# Altium PCB VE_Test_MEA_Solid_4mmpitch.PcbDoc
Units mm, origin at the board's own origin, x right, y up, seen from the top; angles counter-clockwise.
Board outline 49 x 49 mm, 4 copper layers (Top Copper Layer, Internal Copper Layer 1, Internal Copper Layer 2, Bottom Copper Layer), stack 1.58 mm thick; 1 components, 1 nets, 120 pads, 0 vias.
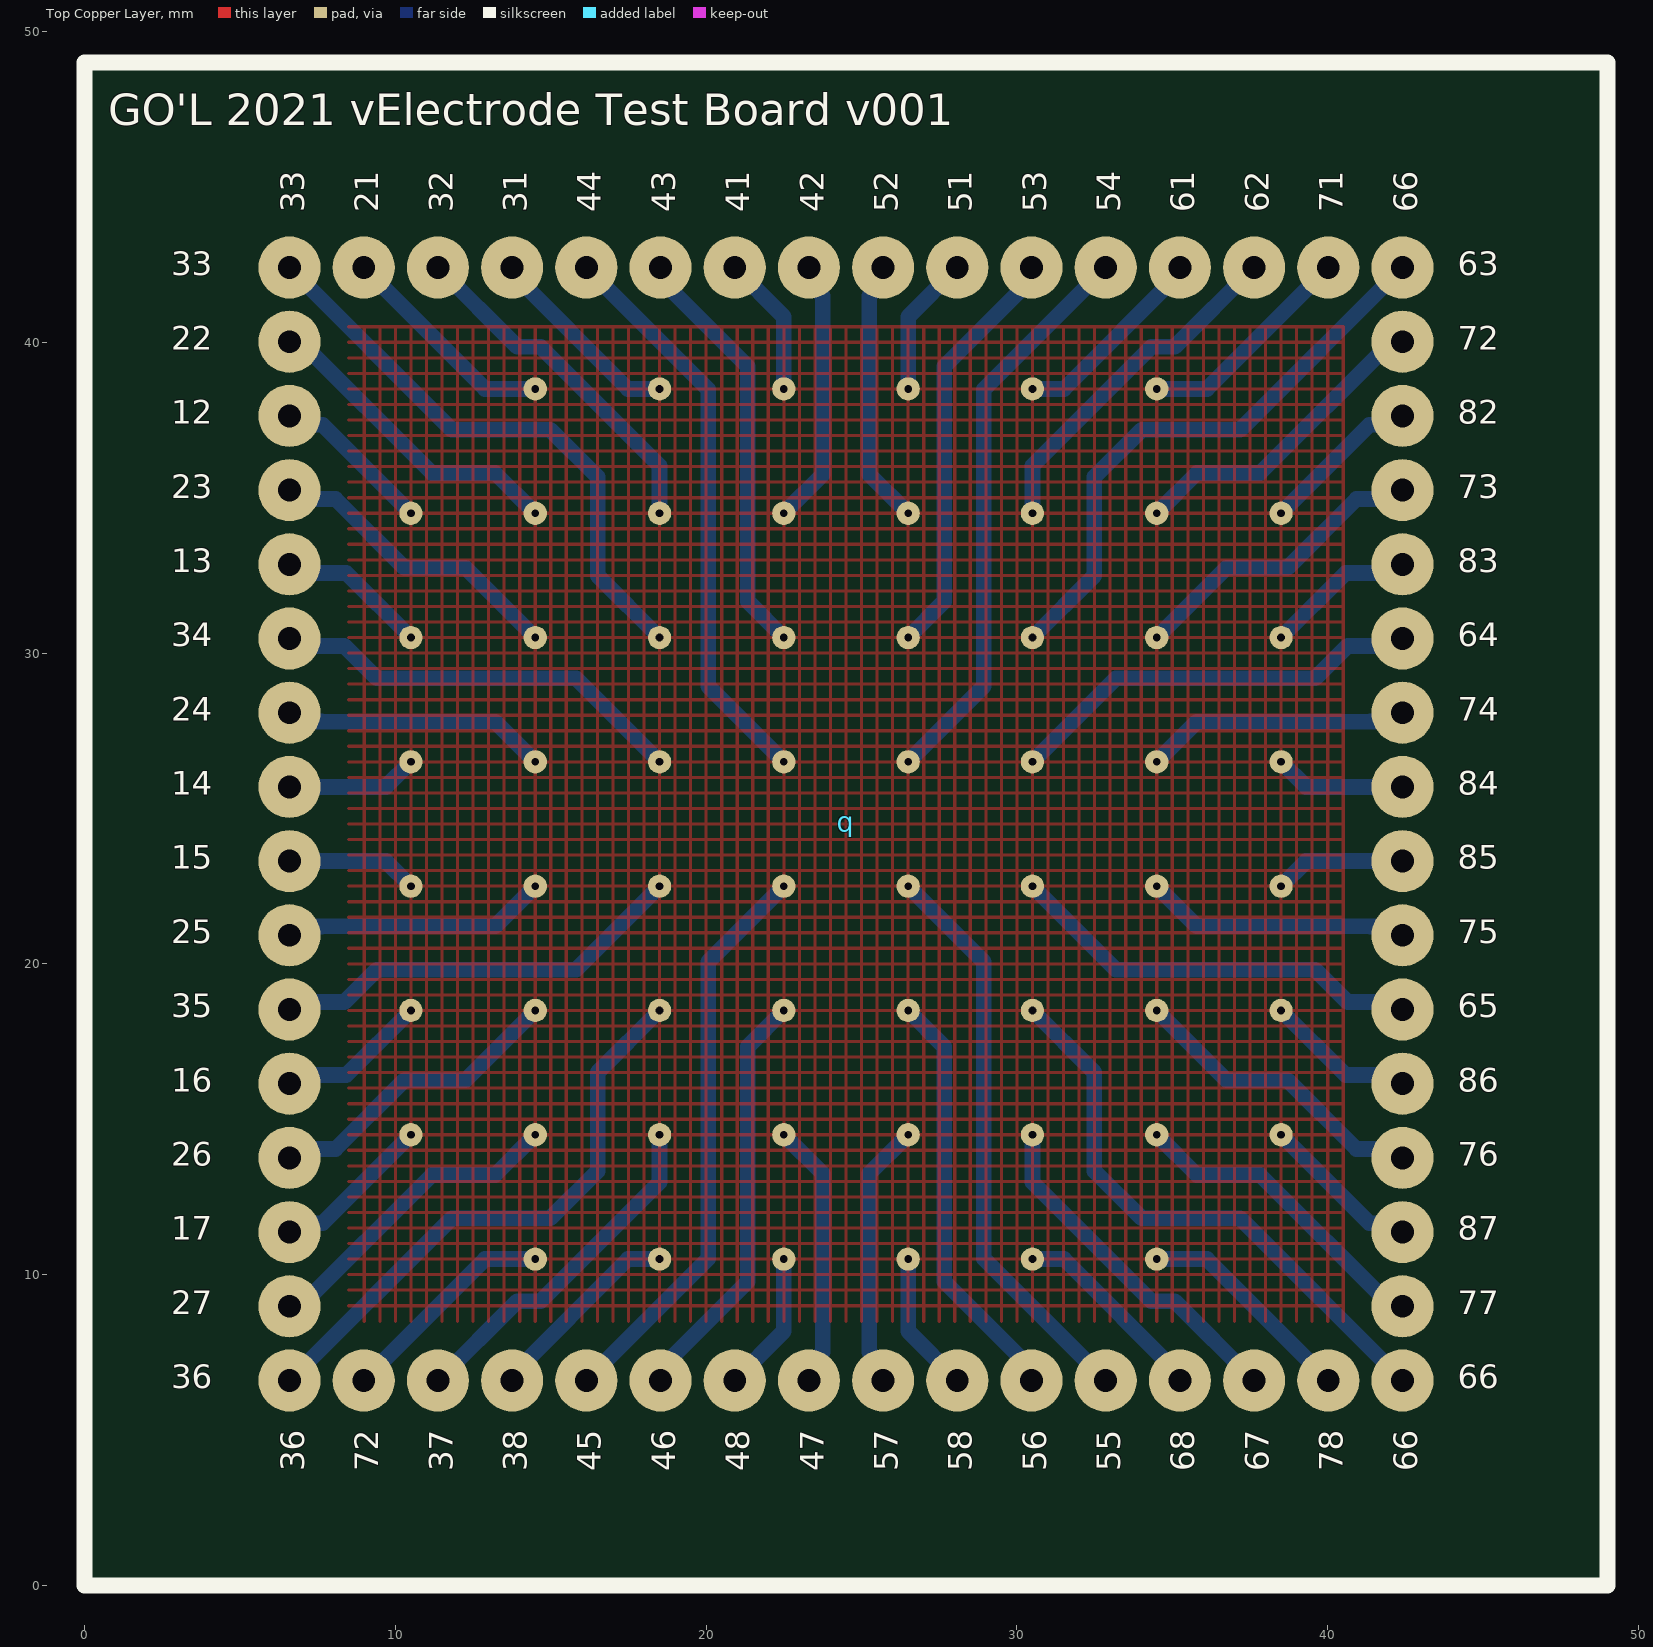
[diagram p0: Top Copper Layer view]
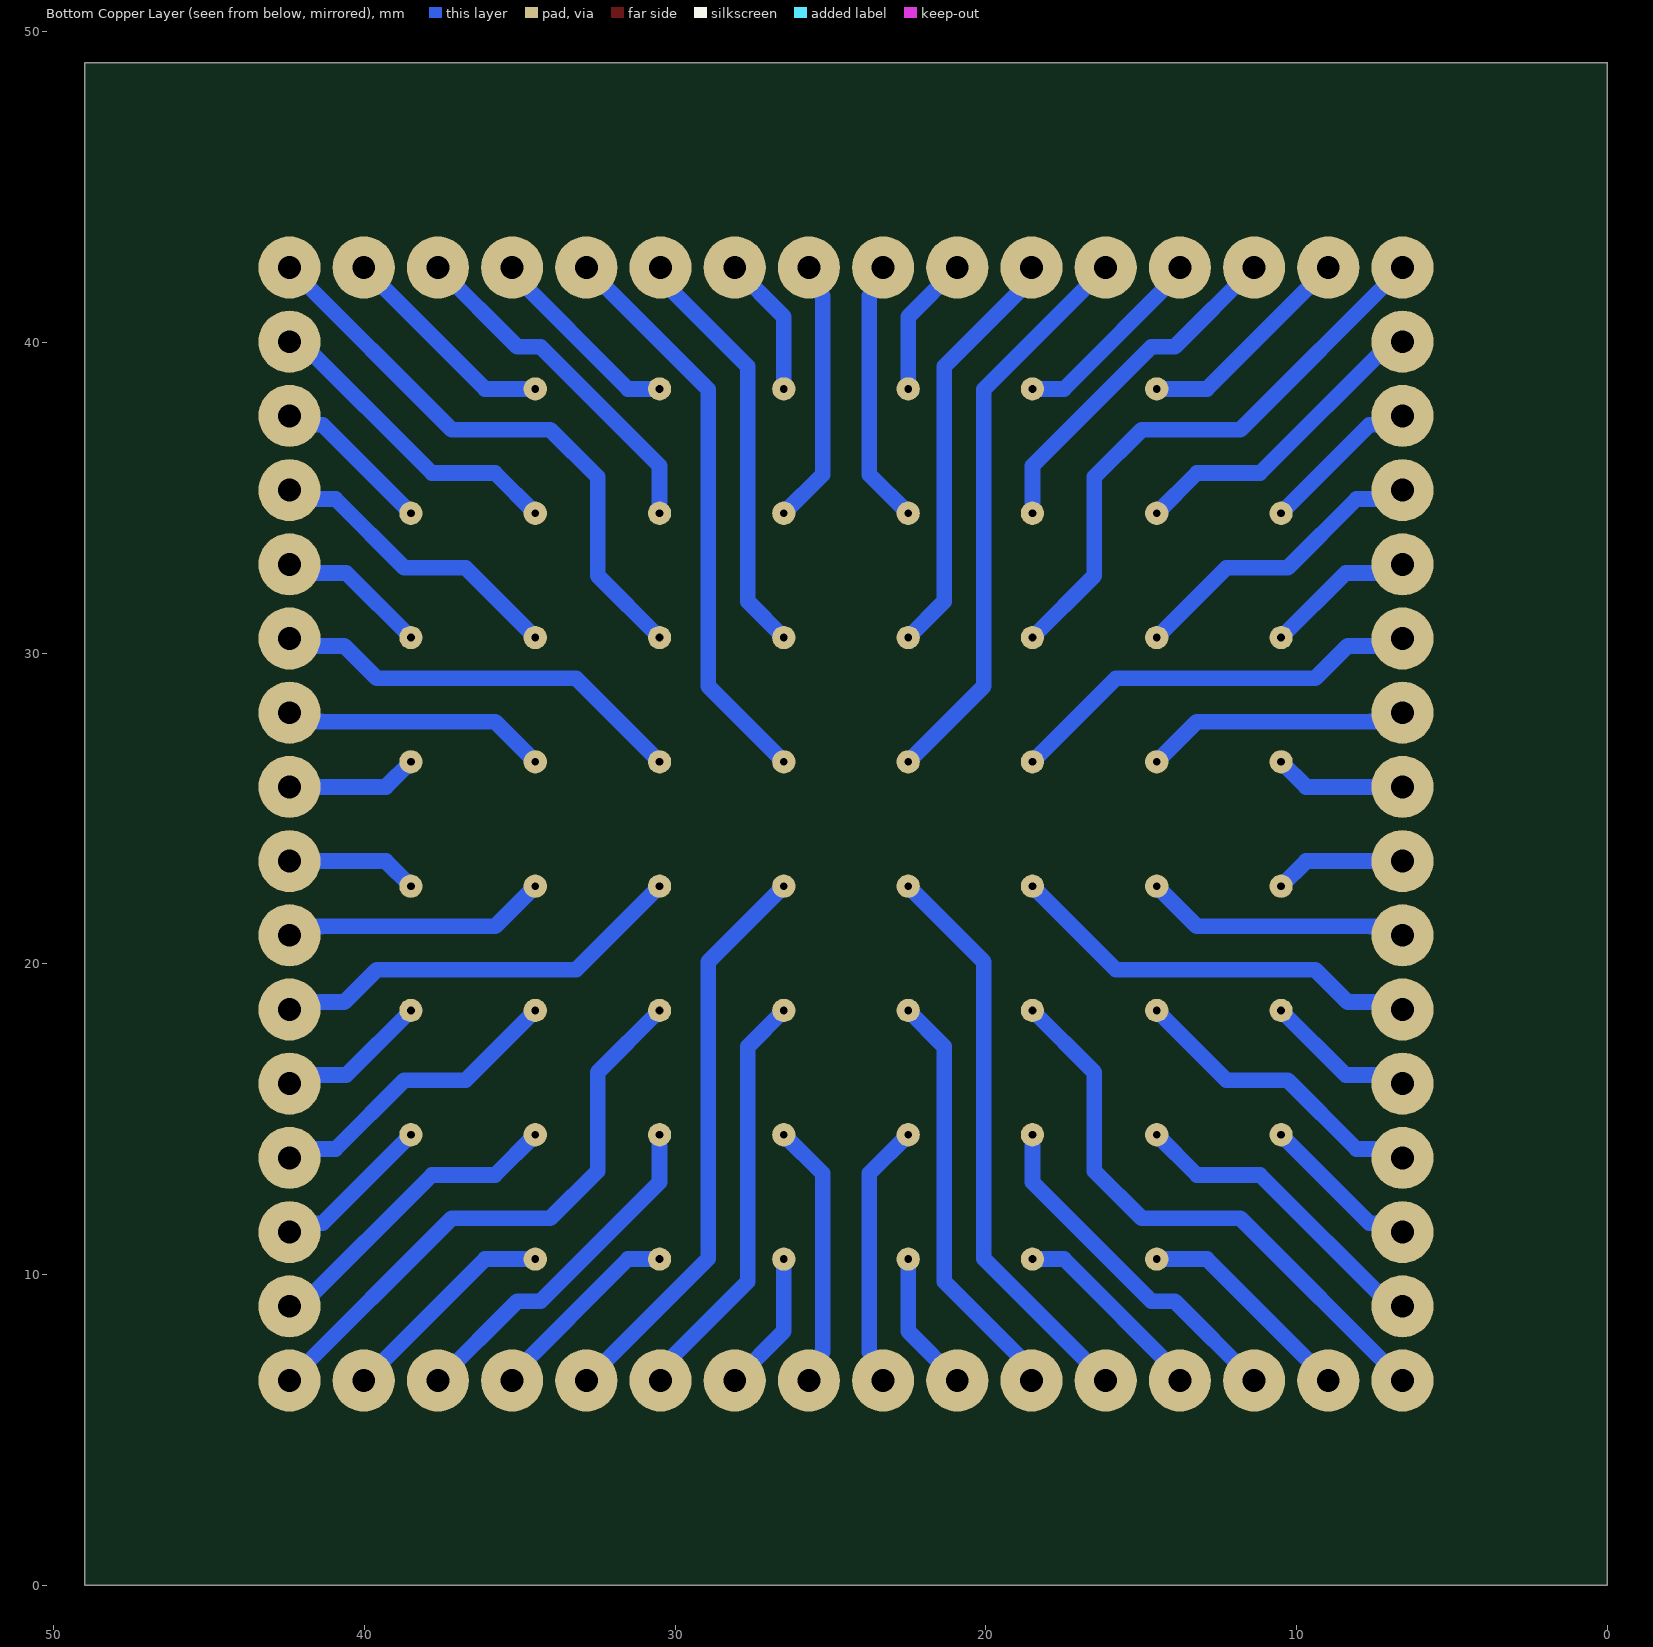
[diagram p1: Bottom Copper Layer view, seen from below]

## Layer stack, top to bottom
Top Solder: solder mask 0.01, Solder Resist, Dk 3.5
Top Copper Layer: signal copper 0.035
Dielectric 1: prepreg 0.22, FR-4, Dk 4.2
Internal Copper Layer 1: signal copper 0.035
Dielectric 2: core 1, FR-4, Dk 4.2
Internal Copper Layer 2: signal copper 0.035
Dielectric 3: prepreg 0.22, FR-4, Dk 4.2
Bottom Copper Layer: signal copper 0.035
Bottom Solder: solder mask 0.01, Solder Resist, Dk 3.5

## Board outline
0,0 49,0 49,49 0,49

## Design rules (kind name [scope] priority, off if disabled: settings)
BoardOutlineClearance [All] p1: gap=0.4 ignorepadtopadclearanceinfootprint=FALSE
Clearance [All] p1: gap=0.102 ignorepadtopadclearanceinfootprint=TRUE
ComponentClearance [All] p1: gap=0.15 collisioncheckmode=3 verticalgap=0.15 showdistances=FALSE
HoleSize [All] p1: absolutevalues=TRUE maxlimit=0.4 minlimit=0.25 maxpercent=80.000 minpercent=20.000
HoleToHoleClearance [All] p1: gap=0.45 allowstackedmicrovias=TRUE
MinimumAnnularRing [All] p1: minimumring=0.15
MinimumSolderMaskSliver [All] p1: minsoldermaskwidth=0.15
PlaneClearance [All] p1: clearance=0.15
PlaneConnect [All] p1: planeconnectstyle=Relief reliefexpansion=0.25 reliefentries=4 reliefconductorwidth=0.15 reliefairgap=0.15
PolygonConnect [All] p1: connectstyle=Direct reliefconductorwidth=0.15 reliefentries=4 polygonreliefangle="90 Angle" airgapwidth=0.15
RoomDefinition VE_Test_MEA_Solid [InComponentClass('VE_Test_MEA_Solid')] p1 off: confinementstyle=ConfineIn formatcopy=TRUE lockcomponents=FALSE outline 0,0 50.8,0 50.8,25.4 0,25.4
RoutingVias [All] p1: holewidth=0.25 width=0.55 viastyle="Through Hole" minholewidth=0.25 minwidth=0.55 maxholewidth=0.4 maxwidth=0.8
SilkToSilkClearance [All] p1: silktosilkclearance=0.2
SilkToSolderMaskClearance [IsPad] p1: minsilkscreentomaskgap=0.2 clearancetoexposedcopper=TRUE
SolderMaskExpansion [All] p1: expansion=0.15 istentingtop=FALSE
Width [All] p1: maxlimit=50 minlimit=0.15 preferedwidth=0.203
22 further rules are at their usual default settings.

## Components (designator, comment, footprint, x,y, rotation, side; value= is the part's Value field where it differs from the comment)
q "POGO_PINS" MCS_MEA_VE_TEST 24.5,24.5 r0 top locked (schematic designator *?)

## Footprints (in the part's own frame and the unit in brackets; to place one, negate y for a bottom-side part, rotate by r counter-clockwise, add the part's x,y. Pads: shape width x height; smd on the part's side, far side on the other; paste and mask are expansions set on the pad)
MCS_MEA_VE_TEST [mm]
  round 2 hole 0.737 mask+0.15: 12(-17.907,13.132) 13(-17.907,8.357) 14(-17.907,1.194) 15(-17.907,-1.194) 16(-17.907,-8.357) 17(-17.907,-13.132) 21(-15.519,17.907) 22(-17.907,15.519) 23(-17.907,10.744) 24(-17.907,3.581) 25(-17.907,-3.581) 26(-17.907,-10.744) 27(-17.907,-15.519) 28(-15.519,-17.907) 31(-10.744,17.907) 32(-13.132,17.907) 33(-17.907,17.907) 34(-17.907,5.969) 35(-17.907,-5.969) 36(-17.907,-17.907) 37(-13.132,-17.907) 38(-10.744,-17.907) 41(-3.581,17.907) 42(-1.194,17.907) 43(-5.969,17.907) 44(-8.357,17.907) 45(-8.357,-17.907) 46(-5.969,-17.907) 47(-1.194,-17.907) 48(-3.581,-17.907) 51(3.581,17.907) 52(1.194,17.907) 53(5.969,17.907) 54(8.357,17.907) 55(8.357,-17.907) 56(5.969,-17.907) 57(1.194,-17.907) 58(3.581,-17.907) 61(10.744,17.907) 62(13.132,17.907) 63(17.907,17.907) 64(17.907,5.969) 65(17.907,-5.969) 66(17.907,-17.907) 67(13.132,-17.907) 68(10.744,-17.907) 71(15.519,17.907) 72(17.907,15.519) 73(17.907,10.744) 74(17.907,3.581) 75(17.907,-3.581) 76(17.907,-10.744) 77(17.907,-15.519) 78(15.519,-17.907) 82(17.907,13.132) 83(17.907,8.357) 84(17.907,1.194) 85(17.907,-1.194) 86(17.907,-8.357) 87(17.907,-13.132)
  round 0.75 hole 0.25 mask+0: 12(-14,10) 13(-14,6) 14(-14,2) 15(-14,-2) 16(-14,-6) 17(-14,-10) 21(-10,14) 22(-10,10) 23(-10,6) 24(-10,2) 25(-10,-2) 26(-10,-6) 27(-10,-10) 28(-10,-14) 31(-6,14) 32(-6,10) 33(-6,6) 34(-6,2) 35(-6,-2) 36(-6,-6) 37(-6,-10) 38(-6,-14) 41(-2,14) 42(-2,10) 43(-2,6) 44(-2,2) 45(-2,-2) 46(-2,-6) 47(-2,-10) 48(-2,-14) 51(2,14) 52(2,10) 53(2,6) 54(2,2) 55(2,-2) 56(2,-6) 57(2,-10) 58(2,-14) 61(6,14) 62(6,10) 63(6,6) 64(6,2) 65(6,-2) 66(6,-6) 67(6,-10) 68(6,-14) 71(10,14) 72(10,10) 73(10,6) 74(10,2) 75(10,-2) 76(10,-6) 77(10,-10) 78(10,-14) 82(14,10) 83(14,6) 84(14,2) 85(14,-2) 86(14,-6) 87(14,-10)
  silkscreen extent -24.5,-24.5 24.5,24.5

## Nets (pads, with @x,y where several pads share a name; then routed paths per layer and width w, separated by ;. In a path a pad name is that pad's centre, name@x,y a point inside that pad or via, vN(x,y) a via of type N, cw(c..) or ccw(c..) an arc to the next point about the centre after c; other vN are vias at no path point)
Net*?_12: q.12 q.13 q.14 q.15 q.16 q.17 q.21 q.22 q.23 q.24 q.25 q.26 q.27 q.28 q.31 q.32 q.33 q.34 q.35 q.36 q.37 q.38 q.41 q.42 q.43 q.44 q.45 q.46 q.47 q.48 q.51 q.52 q.53 q.54 q.55 q.56 q.57 q.58 q.61 q.62 q.63 q.64 q.65 q.66 q.67 q.68 q.71 q.72 q.73 q.74 q.75 q.76 q.77 q.78 q.82 q.83 q.84 q.85 q.86 q.87 | length 581.5
  Bottom Copper Layer w0.508: q.36@6.593,6.593 11.811,11.811 14.986,11.811 16.51,13.335 16.51,16.51 q.36@18.5,18.5 ; q.27@6.593,8.981 6.949,8.981 11.176,13.208 13.208,13.208 q.27@14.5,14.5 ; q.17@6.593,11.368 6.878,11.654 7.654,11.654 q.17@10.5,14.5 ; q.26@6.593,13.756 6.878,14.041 8.072,14.041 10.287,16.256 12.256,16.256 q.26@14.5,18.5 ; q.16@6.593,16.143 6.87,16.42 8.42,16.42 q.16@10.5,18.5 ; q.35@6.593,18.531 6.831,18.769 8.355,18.769 9.398,19.812 15.812,19.812 q.35@18.5,22.5 ; q.25@6.593,20.919 6.878,21.204 7.632,21.204 7.637,21.209 13.209,21.209 q.25@14.5,22.5 ; q.15@6.593,23.306 9.694,23.306 q.15@10.5,22.5 ; q.14@6.593,25.694 9.694,25.694 q.14@10.5,26.5 ; q.24@6.593,28.081 6.878,27.796 7.632,27.796 7.637,27.791 13.209,27.791 q.24@14.5,26.5 ; q.34@6.593,30.469 6.831,30.231 8.355,30.231 9.398,29.188 15.812,29.188 q.34@18.5,26.5 ; q.13@6.593,32.857 6.87,32.58 8.42,32.58 q.13@10.5,30.5 ; q.23@6.593,35.244 6.878,34.959 8.072,34.959 10.287,32.744 12.256,32.744 q.23@14.5,30.5 ; q.12@6.593,37.632 6.878,37.346 7.654,37.346 q.12@10.5,34.5 ; q.22@6.593,40.019 6.949,40.019 11.176,35.792 13.208,35.792 q.22@14.5,34.5 ; q.33@6.593,42.407 11.811,37.189 14.986,37.189 16.51,35.665 16.51,32.49 q.33@18.5,30.5 ; q.28@8.981,6.593 12.888,10.5 q.28@14.5,10.5 ; q.21@8.981,42.407 12.888,38.5 q.21@14.5,38.5 ; q.37@11.368,6.593 13.919,9.144 14.671,9.144 18.5,12.973 q.37@18.5,14.5 ; q.32@11.368,42.407 13.919,39.856 14.671,39.856 18.5,36.027 q.32@18.5,34.5 ; q.38@13.756,6.593 13.756,6.771 17.485,10.5 q.38@18.5,10.5 ; q.31@13.756,42.407 13.756,42.229 17.485,38.5 q.31@18.5,38.5 ; q.45@16.143,6.593 20.066,10.516 20.066,20.066 q.45@22.5,22.5 ; q.44@16.143,42.407 20.066,38.484 20.066,28.934 q.44@22.5,26.5 ; q.46@18.531,6.593 18.531,6.974 21.336,9.779 21.336,17.336 q.46@22.5,18.5 ; q.43@18.531,42.407 18.531,42.026 21.336,39.221 21.336,31.664 q.43@22.5,30.5 ; q.48@20.919,6.593 22.5,8.174 q.48@22.5,10.5 ; q.41@20.919,42.407 22.5,40.826 q.41@22.5,38.5 ; q.47@22.5,14.5 23.749,13.251 23.749,7.508 23.306,7.065 q.47@23.306,6.593 ; q.42@22.5,34.5 23.749,35.749 23.749,41.492 23.306,41.935 q.42@23.306,42.407 ; q.57@25.694,6.593 25.694,7.065 25.251,7.508 25.251,13.251 q.57@26.5,14.5 ; q.52@25.694,42.407 25.694,41.935 25.251,41.492 25.251,35.749 q.52@26.5,34.5 ; q.58@26.5,10.5 26.5,8.174 q.58@28.081,6.593 ; q.56@26.5,18.5 27.664,17.336 27.664,9.779 30.469,6.974 q.56@30.469,6.593 ; q.55@26.5,22.5 28.934,20.066 28.934,10.516 q.55@32.857,6.593 ; q.54@26.5,26.5 28.934,28.934 28.934,38.484 q.54@32.857,42.407 ; q.53@26.5,30.5 27.664,31.664 27.664,39.221 30.469,42.026 q.53@30.469,42.407 ; q.51@26.5,38.5 26.5,40.826 q.51@28.081,42.407 ; q.68@30.5,10.5 31.515,10.5 35.244,6.771 q.68@35.244,6.593 ; q.67@30.5,14.5 30.5,12.973 34.329,9.144 35.081,9.144 q.67@37.632,6.593 ; q.66@30.5,18.5 32.49,16.51 32.49,13.335 34.014,11.811 37.189,11.811 q.66@42.407,6.593 ; q.65@30.5,22.5 33.188,19.812 39.602,19.812 40.645,18.769 42.169,18.769 q.65@42.407,18.531 ; q.64@30.5,26.5 33.188,29.188 39.602,29.188 40.645,30.231 42.169,30.231 q.64@42.407,30.469 ; q.63@30.5,30.5 32.49,32.49 32.49,35.665 34.014,37.189 37.189,37.189 q.63@42.407,42.407 ; q.62@30.5,34.5 30.5,36.027 34.329,39.856 35.081,39.856 q.62@37.632,42.407 ; q.61@30.5,38.5 31.515,38.5 35.244,42.229 q.61@35.244,42.407 ; q.78@34.5,10.5 36.112,10.5 q.78@40.019,6.593 ; q.77@34.5,14.5 35.792,13.208 37.824,13.208 42.051,8.981 q.77@42.407,8.981 ; q.76@34.5,18.5 36.744,16.256 38.713,16.256 40.928,14.041 42.122,14.041 q.76@42.407,13.756 ; q.75@34.5,22.5 35.791,21.209 41.363,21.209 41.368,21.204 42.122,21.204 q.75@42.407,20.919 ; q.74@34.5,26.5 35.791,27.791 41.363,27.791 41.368,27.796 42.122,27.796 q.74@42.407,28.081 ; q.73@34.5,30.5 36.744,32.744 38.713,32.744 40.928,34.959 42.122,34.959 q.73@42.407,35.244 ; q.72@34.5,34.5 35.792,35.792 37.824,35.792 42.051,40.019 q.72@42.407,40.019 ; q.71@34.5,38.5 36.112,38.5 q.71@40.019,42.407 ; q.87@38.5,14.5 41.346,11.654 42.122,11.654 q.87@42.407,11.368 ; q.86@38.5,18.5 40.58,16.42 42.13,16.42 q.86@42.407,16.143 ; q.85@38.5,22.5 39.306,23.306 q.85@42.407,23.306 ; q.84@38.5,26.5 39.306,25.694 q.84@42.407,25.694 ; q.83@38.5,30.5 40.58,32.58 42.13,32.58 q.83@42.407,32.857 ; q.82@38.5,34.5 41.346,37.346 42.122,37.346 q.82@42.407,37.632

## Polygon pours and split planes (outlines as drawn)
Net*?_12 on Top Copper Layer "NET*?_12_L01_P000" (hatched 90Degree grid 0.5 track 0.102, pour order 0): 8.5,40.5 40.5,40.5 40.5,8.5 8.5,8.5

## Silkscreen, mask and mechanical layers (free items; w line width, h text height)
Top Overlay:
  the board outline again, w0.508
  text "GO'L 2021 vElectrode Test Board v001" at 0.762,46.99 h1.02

## Text inside footprints (layer, text, board x,y; h text height)
q: Top Overlay "33" at 2.783,42.153 h0.76; Top Overlay "22" at 2.783,39.765 h0.76; Top Overlay "12" at 2.783,37.378 h0.76; Top Overlay "23" at 2.783,34.99 h0.76; Top Overlay "13" at 2.783,32.603 h0.76; Top Overlay "34" at 2.783,30.215 h0.76; Top Overlay "24" at 2.783,27.827 h0.76; Top Overlay "14" at 2.783,25.44 h0.76; Top Overlay "15" at 2.783,23.052 h0.76; Top Overlay "25" at 2.783,20.665 h0.76; Top Overlay "35" at 2.783,18.277 h0.76; Top Overlay "16" at 2.783,15.889 h0.76; Top Overlay "26" at 2.783,13.502 h0.76; Top Overlay "17" at 2.783,11.114 h0.76; Top Overlay "27" at 2.783,8.727 h0.76; Top Overlay "36" at 2.783,6.339 h0.76; Top Overlay "63" at 44.185,42.153 h0.76; Top Overlay "72" at 44.185,39.765 h0.76; Top Overlay "82" at 44.185,37.378 h0.76; Top Overlay "73" at 44.185,34.99 h0.76; Top Overlay "83" at 44.185,32.603 h0.76; Top Overlay "64" at 44.185,30.215 h0.76; Top Overlay "74" at 44.185,27.827 h0.76; Top Overlay "84" at 44.185,25.44 h0.76; Top Overlay "85" at 44.185,23.052 h0.76; Top Overlay "75" at 44.185,20.665 h0.76; Top Overlay "65" at 44.185,18.277 h0.76; Top Overlay "86" at 44.185,15.889 h0.76; Top Overlay "76" at 44.185,13.502 h0.76; Top Overlay "87" at 44.185,11.114 h0.76; Top Overlay "77" at 44.185,8.727 h0.76; Top Overlay "66" at 44.185,6.339 h0.76; Top Overlay "36" at 7.063,3.668 h0.76 r90; Top Overlay "72" at 9.45,3.668 h0.76 r90; Top Overlay "37" at 11.838,3.668 h0.76 r90; Top Overlay "38" at 14.226,3.668 h0.76 r90; Top Overlay "45" at 16.613,3.668 h0.76 r90; Top Overlay "46" at 19.001,3.668 h0.76 r90; Top Overlay "48" at 21.388,3.668 h0.76 r90; Top Overlay "47" at 23.776,3.668 h0.76 r90; Top Overlay "57" at 26.164,3.668 h0.76 r90; Top Overlay "58" at 28.551,3.668 h0.76 r90; Top Overlay "56" at 30.939,3.668 h0.76 r90; Top Overlay "55" at 33.326,3.668 h0.76 r90; Top Overlay "68" at 35.714,3.668 h0.76 r90; Top Overlay "67" at 38.102,3.668 h0.76 r90; Top Overlay "78" at 40.489,3.668 h0.76 r90; Top Overlay "66" at 42.877,3.668 h0.76 r90; Top Overlay "33" at 7.063,44.181 h0.76 r90; Top Overlay "21" at 9.45,44.181 h0.76 r90; Top Overlay "32" at 11.838,44.181 h0.76 r90; Top Overlay "31" at 14.226,44.181 h0.76 r90; Top Overlay "44" at 16.613,44.181 h0.76 r90; Top Overlay "43" at 19.001,44.181 h0.76 r90; Top Overlay "41" at 21.388,44.181 h0.76 r90; Top Overlay "42" at 23.776,44.181 h0.76 r90; Top Overlay "52" at 26.164,44.181 h0.76 r90; Top Overlay "51" at 28.551,44.181 h0.76 r90; Top Overlay "53" at 30.939,44.181 h0.76 r90; Top Overlay "54" at 33.326,44.181 h0.76 r90; Top Overlay "61" at 35.714,44.181 h0.76 r90; Top Overlay "62" at 38.102,44.181 h0.76 r90; Top Overlay "71" at 40.489,44.181 h0.76 r90; Top Overlay "66" at 42.877,44.181 h0.76 r90